# EAGLE board 1EE2CE_Senior_Design_Multicell Battery Load Analyzer (EAGLE 9.7.0)
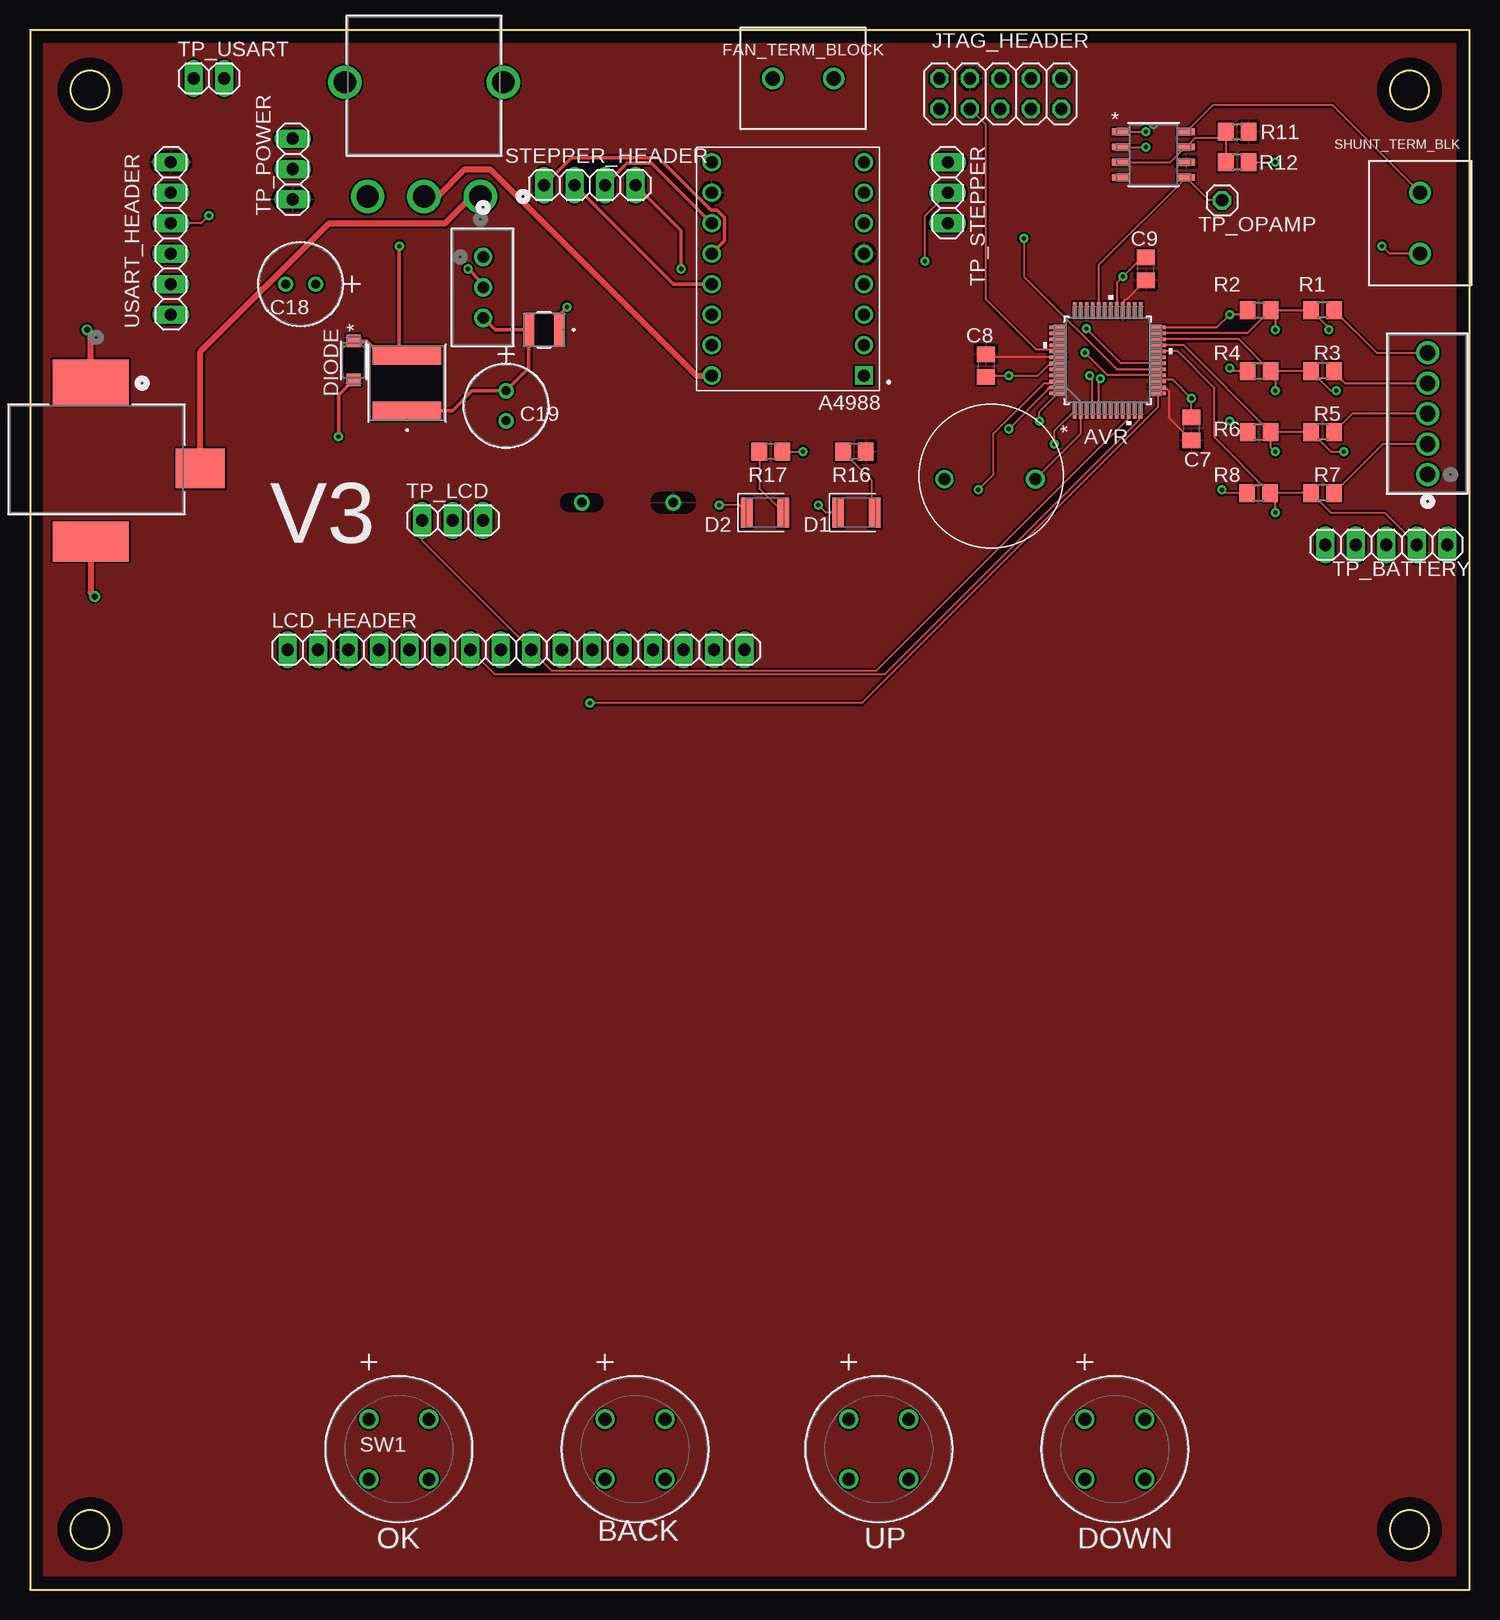
[diagram p0: board, top side]
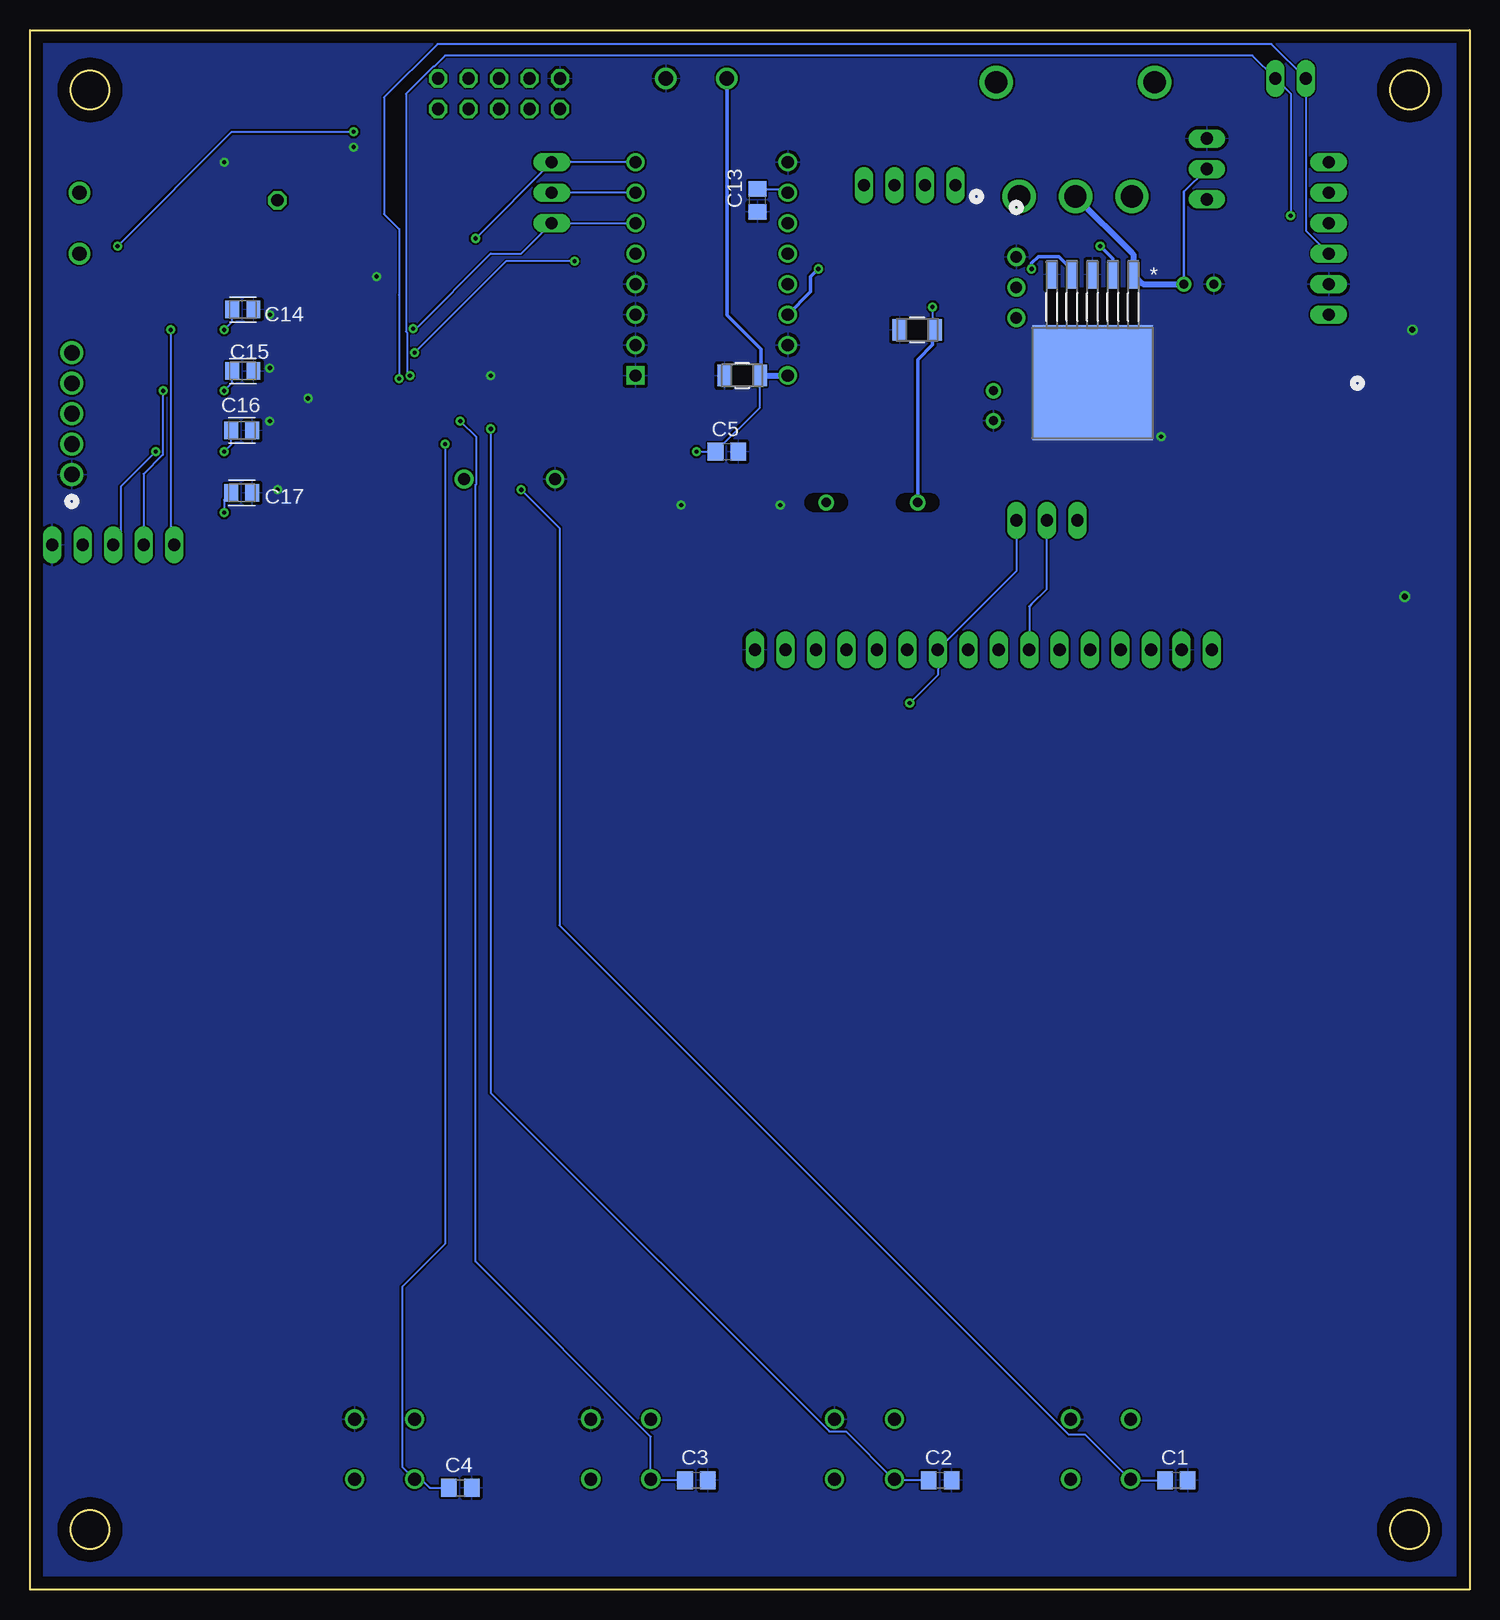
[diagram p1: board, bottom side, seen from below]

Size 120 x 130 mm. Coordinates in mm from the lower left corner, seen from the top.
Outline: 0,0 120,0 120,130 0,130 0,0
Outline: circle at 115,5 radius 1.6
Outline: circle at 115,125 radius 1.6
Outline: circle at 5,125 radius 1.6
Outline: circle at 5,5 radius 1.6
Copper layers (1*16): Top / Bottom
Stack-up Default Layer Stack: Top User Defined 0.035mm / Dielectric-1 User Defined 1.5mm / Bottom User Defined 0.035mm
Design rules: minimum copper width class=1 1mm, minimum copper width 6mil, minimum drill size 0.35mm, copper clearance wire_polygon to wire_polygon 6mil, copper clearance wire_polygon to pad_smd 6mil, copper clearance wire_polygon to via 6mil, copper clearance pad_smd to pad_smd 6mil, copper clearance pad_smd to via 6mil, copper clearance via to via 6mil, copper clearance smd to pad (same net) 6mil, copper clearance smd to via (same net) 6mil, copper clearance smd to smd (same net) 6mil, dimension clearance 40mil, via restrict clearance 0mil, restrict clearance 0mil, drill distance 6mil, keepout clearance 0mil
Net classes: 1 highest_current: width 1 mm

## Footprints (pad centres in the part's own frame; a part is rotated, then mirrored left to right if it is on the bottom)
IND_TAIYO_CBC3225_TAY = smd 0.851 x 2.692: 1 -1.276,0; 2 1.276,0
IND_TAIYO_NR6028_TAY = smd 1.6 x 5.69: 1 -2.349,0; 2 2.349,0
RES_PV36W503C01B00_BRN = drill 0.965 pad 1.524: 1 0,0; 2 2.54,0; 3 5.08,0
CAP_GRM31C_MUR = smd 1.168 x 1.803: 1 -1.473,0; 2 1.473,0
MODULE_A4988_STEPPER_MOTOR_DRIVER_CARRIER = drill 1.02 square: 1 -6.35,8.89 | drill 1.02: 2 -6.35,6.35; 3 -6.35,3.81; 4 -6.35,1.27; 5 -6.35,-1.27; 6 -6.35,-3.81; 7 -6.35,-6.35; 8 -6.35,-8.89; 9 6.35,-8.89; 10 6.35,-6.35; 11 6.35,-3.81; 12 6.35,-1.27; 13 6.35,1.27; 14 6.35,3.81; 15 6.35,6.35; 16 6.35,8.89
TQFP48_PT_MCH = smd 1.346 x 0.279: 1 -4.178,2.75; 2 -4.178,2.25; 3 -4.178,1.75; 4 -4.178,1.25; 5 -4.178,0.75; 6 -4.178,0.25; 7 -4.178,-0.25; 8 -4.178,-0.75; 9 -4.178,-1.25; 10 -4.178,-1.75; 11 -4.178,-2.25; 12 -4.178,-2.75; 25 4.178,-2.75; 26 4.178,-2.25; 27 4.178,-1.75; 28 4.178,-1.25; 29 4.178,-0.75; 30 4.178,-0.25; 31 4.178,0.25; 32 4.178,0.75; 33 4.178,1.25; 34 4.178,1.75; 35 4.178,2.25; 36 4.178,2.75 | smd 0.279 x 1.346: 13 -2.75,-4.178; 14 -2.25,-4.178; 15 -1.75,-4.178; 16 -1.25,-4.178; 17 -0.75,-4.178; 18 -0.25,-4.178; 19 0.25,-4.178; 20 0.75,-4.178; 21 1.25,-4.178; 22 1.75,-4.178; 23 2.25,-4.178; 24 2.75,-4.178; 37 2.75,4.178; 38 2.25,4.178; 39 1.75,4.178; 40 1.25,4.178; 41 0.75,4.178; 42 0.25,4.178; 43 -0.25,4.178; 44 -0.75,4.178; 45 -1.25,4.178; 46 -1.75,4.178; 47 -2.25,4.178; 48 -2.75,4.178
JACK_RASM712BKZ_SWC = smd 3.81 x 6.35: 1 -6.426,-0.483 | smd 3.302 x 4.064: 2 0.762,8.661 | smd 3.302 x 6.35: 3 6.858,-0.483
CONN5_516X256_OST = drill 1.295 pad 1.803: 1 0,0; 2 -2.54,0; 3 -5.08,0; 4 -7.62,0; 5 -10.16,0
C0805 = smd 1.3 x 1.5: 1 -0.95,0; 2 0.95,0
CAPC2012X110 = smd 1.165 x 1.465: 1 -0.875,0; 2 0.875,0
CAP_YX_6P3X11_RUB = drill 0.762 pad 1.27: 1 0,0; 2 2.5,0
LEDC3224X250N_RND-G = smd 0.962 x 2.512: A 1.525,0; C -1.525,0
LEDC3224X250N_RND-R = smd 0.962 x 2.512: A 1.525,0; C -1.525,0
SOD_34FA_ONS = smd 1.041 x 1.194: 1 -1.613,0; 2 1.613,0
TERMBLK_508-2N = drill 1.2: 1 0,0; 2 5.08,0
2X05 = drill 1.016 octagon: 1 -5.08,-1.27; 2 -5.08,1.27; 3 -2.54,-1.27; 4 -2.54,1.27; 5 0,-1.27; 6 0,1.27; 7 2.54,-1.27; 8 2.54,1.27; 9 5.08,-1.27; 10 5.08,1.27
1X16 = drill 1.016 long: 1 -19.05,0; 2 -16.51,0; 3 -13.97,0; 4 -11.43,0; 5 -8.89,0; 6 -6.35,0; 7 -3.81,0; 8 -1.27,0; 9 1.27,0; 10 3.81,0; 11 6.35,0; 12 8.89,0; 13 11.43,0; 14 13.97,0; 15 16.51,0; 16 19.05,0
D2PAK-5_ONS-L = smd 0.914 x 2.388: 1 -3.404,-9.068; 2 -1.702,-9.068; 3 0,-9.068; 4 1.702,-9.068; 5 3.404,-9.068 | smd 10.033 x 9.601: 6 0,-0.051
R-8_ADI = smd 1.46 x 0.559: 1 -2.724,1.905; 2 -2.724,0.635; 3 -2.724,-0.635; 4 -2.724,-1.905; 5 2.724,-1.905; 6 2.724,-0.635; 7 2.724,0.635; 8 2.724,1.905
R0805 = smd 1.3 x 1.5: 1 -0.95,0; 2 0.95,0
1X04 = drill 1.016 long: 1 -3.81,0; 2 -1.27,0; 3 1.27,0; 4 3.81,0
D6R90_CNK = drill 1.067 pad 1.575: 1 0,0; 2 5,0; 3 5,-5; 4 0,-5
SW3_500SSP3S1M6QEA_EWI = drill 1.854 pad 2.362: 1 0,0; 2 4.7,0; 3 9.4,0; 4 -1.904,-9.525; 5 11.304,-9.525
1X05 = drill 1.016 long: 1 -5.08,0; 2 -2.54,0; 3 0,0; 4 2.54,0; 5 5.08,0
1X03 = drill 1.016 long: 1 -2.54,0; 2 0,0; 3 2.54,0
1X01 = drill 1.016 octagon: 1 0,0
1X02 = drill 1.016 long: 1 -1.27,0; 2 1.27,0
FUSE = drill 0.8 slot 2.8: P$1 8.89,0; P$3 1.27,0
BUZZER = drill 1 pad 1.6: + 3.69,-0.24 | drill 1 pad 1.27: - -3.91,-0.24
1X06 = drill 1.016 long: 1 -6.35,0; 2 -3.81,0; 3 -1.27,0; 4 1.27,0; 5 3.81,0; 6 6.35,0

## Placement (x,y rotation side)
22UH_L  CBC3225T220KRIND_TAIYO_CBC3225_TAY  [IND_TAIYO_CBC3225_TAY]  42.86,105 180 top
33UH_L  33uH  [IND_TAIYO_NR6028_TAY]  31.43,100.56 90 top
50KPOT  PV36W503C01B00RES_PV36W503C01B00_BRN  [RES_PV36W503C01B00_BRN]  37.77,111.08 270 top
100UF_CAP1  GRM31CD80J107MEA8KCAP_GRM31C_MUR  [CAP_GRM31C_MUR]  60.63,101.19 0 bottom
100UF_CAP2  100uF  [CAP_GRM31C_MUR]  46.03,105 180 bottom
A4988  A4988_STEPPER_MOTOR_DRIVER_CARRIER  [MODULE_A4988_STEPPER_MOTOR_DRIVER_CARRIER]  63.17,110.09 180 top
AVR  AVR128DB48T-E/PTTQFP48_PT_MCH  [TQFP48_PT_MCH]  89.84,102.47 90 top
BARREL_CONNECTOR  RASM712BKZJACK_RASM712BKZ_SWC  [JACK_RASM712BKZ_SWC]  5.54,94.21 270 top
BATTERY_TERM_BLK  OSTVN05A150CONN5_516X256_OST  [CONN5_516X256_OST]  116.52,92.94 270 top
C1  1uF  [C0805]  24.44,9.12 0 bottom
C2  1uF  [C0805]  44.12,9.12 0 bottom
C3  1uF  [C0805]  64.44,9.12 0 bottom
C4  1uF  [C0805]  84.13,8.48 0 bottom
C5  10uF  [C0805]  61.91,94.84 0 bottom
C7  100nF  [C0805]  96.83,96.75 90 top
C8  100nF  [C0805]  79.69,102.02 270 top
C9  100nF  [C0805]  93.02,110.09 90 top
C13  100nF  [C0805]  59.37,115.8 90 bottom
C14  100nF  [CAPC2012X110]  102.25,106.7 0 bottom
C15  100nF  [CAPC2012X110]  102.25,101.58 0 bottom
C16  100nF  [CAPC2012X110]  102.35,96.62 0 bottom
C17  100nF  [CAPC2012X110]  102.35,91.42 0 bottom
C18  100 uF  [CAP_YX_6P3X11_RUB]  23.8,108.81 180 top
C19  220 uF  [CAP_YX_6P3X11_RUB]  39.68,99.92 270 top
D1  LED_GREEN  [LEDC3224X250N_RND-G]  68.89,89.77 0 top
D2  LED_RED  [LEDC3224X250N_RND-R]  61.27,89.77 0 top
DIODE  SS34FASOD_34FA_ONS  [SOD_34FA_ONS]  26.98,102.47 270 top
FAN_TERM_BLOCK  TERM-BLK-2P  [TERMBLK_508-2N]  66.98,125.96 180 top
JTAG_HEADER  PINHD-2X5  [2X05]  80.9,124.69 0 top
LCD_HEADER  PINHD-1X16  [1X16]  40.52,78.34 0 top
LM2596  LM2596DSADJR4GD2PAK-5_ONS-L  [D2PAK-5_ONS-L]  31.43,100.56 180 bottom
OP_AMP  AD8410AWBRZ-RLR-8_ADI  [R-8_ADI]  93.66,119.61 0 top
R1  4.3K  [R0805]  107.75,106.66 180 top
R2  1K  [R0805]  102.47,106.66 0 top
R3  4.3K  [R0805]  107.75,101.58 180 top
R4  1K  [R0805]  102.47,101.58 0 top
R5  4.3K  [R0805]  107.75,96.5 180 top
R6  1K  [R0805]  102.47,96.5 0 top
R7  4.3K  [R0805]  107.75,91.42 180 top
R8  1K  [R0805]  102.42,91.42 0 top
R11  32k  [R0805]  100.64,121.52 0 top
R12  1k  [R0805]  100.64,118.97 180 top
R16  1K  [R0805]  68.73,94.84 180 top
R17  2K  [R0805]  61.75,94.84 180 top
SHUNT_TERM_BLK  TERM-BLK-2P  [TERMBLK_508-2N]  115.88,111.35 90 top
STEPPER_HEADER  PINHD-1X04_1X04M  [1X04]  46.66,117.07 0 top
SW1  D6R90F2LFSD6R90_CNK  [D6R90_CNK]  28.25,14.2 0 top
SW2  500SSP3S1M6QEASW3_500SSP3S1M6QEA_EWI  [SW3_500SSP3S1M6QEA_EWI]  37.55,116.12 180 top
SW5  D6R90F2LFSD6R90_CNK  [D6R90_CNK]  87.94,14.2 0 top
SW6  D6R90F2LFSD6R90_CNK  [D6R90_CNK]  68.25,14.2 0 top
SW7  D6R90F2LFSD6R90_CNK  [D6R90_CNK]  47.94,14.2 0 top
TP_BATTERY  PINHD-1X5  [1X05]  113.07,87.08 0 top
TP_LCD  PINHD-1X03_1X03M  [1X03]  35.23,89.13 0 top
TP_OPAMP  PINHD-1X1  [1X01]  99.37,115.8 0 top
TP_POWER  PINHD-1X3  [1X03]  21.9,118.42 90 top
TP_STEPPER  PINHD-1X03_1X03M  [1X03]  76.51,116.44 270 top
TP_USART  PINHD-1X02_1X02M  [1X02]  14.91,125.96 0 top
U$1  FUSE_1A  [FUSE]  54.89,90.61 180 top
U$4  BUZZER_  [BUZZER]  80.13,92.81 0 top
USART_HEADER  PINHD-1X6  [1X06]  11.74,112.62 270 top

## Library data of the parts
22UH_L = 2025-04-20_23-54-14_Library; COPYRIGHT: Copyright (C) 2025 Ultra Librarian. All rights reserved.; MANUFACTURER_PART_NUMBER: CBC3225T220KR; MFR_NAME: Taiyo Yuden
33UH_L = 2025-04-20_23-55-25_Library; COPYRIGHT: Copyright (C) 2025 Ultra Librarian. All rights reserved.; MANUFACTURER_PART_NUMBER: NR6028T330M; MFR_NAME: Taiyo Yuden
50KPOT = 2025-04-20_23-31-35_Library; COPYRIGHT: Copyright (C) 2025 Ultra Librarian. All rights reserved.; MANUFACTURER_PART_NUMBER: PV36W503C01B00; MFR_NAME: Bourns Electronics
100UF_CAP1 100UF_CAP2 = 2025-04-20_23-59-12_Library; COPYRIGHT: Copyright (C) 2025 Ultra Librarian. All rights reserved.; MANUFACTURER_PART_NUMBER: GRM31CD80J107MEA8K; MFR_NAME: Murata
A4988 = A4988_STEPPER_MOTOR_DRIVER_CARRIER; AVAILABILITY: Not in stock; CHECK_PRICES: https://www.snapeda.com/parts/A4988%20STEPPER%20MOTOR%20DRIVER%20CARRIER/Pololu/view-part/?ref=eda; DESCRIPTION: Stepper Motor Driver; MF: Pololu; MP: A4988 STEPPER MOTOR DRIVER CARRIER; PACKAGE: None; PRICE: None; SNAPEDA_LINK: https://www.snapeda.com/parts/A4988%20STEPPER%20MOTOR%20DRIVER%20CARRIER/Pololu/view-part/?ref=snap
AVR = Multicell Battery Load Analyzer Components; COPYRIGHT: Copyright (C) 2024 Ultra Librarian. All rights reserved.; MANUFACTURER_PART_NUMBER: AVR128DB48T-E/PT; MFR_NAME: Microchip
BARREL_CONNECTOR = barrel; COPYRIGHT: Copyright (C) 2024 Ultra Librarian. All rights reserved.; MANUFACTURER_PART_NUMBER: RASM712BKZ; MFR_NAME: Switchcraft; TYPE: Power Connectors
BATTERY_TERM_BLK = 2025-04-23_05-03-51_Library; COPYRIGHT: Copyright (C) 2025 Ultra Librarian. All rights reserved.; MANUFACTURER_PART_NUMBER: OSTVN05A150; MFR_NAME: On Shore Technology
C1-C5 C7-C9 C13 = rcl; SPICEPREFIX: C
C14-C17 = Capacitor; CATEGORY: Capacitor
C18 = 2024-12-20_15-01-37_Library; COPYRIGHT: Copyright (C) 2024 Ultra Librarian. All rights reserved.; MANUFACTURER_PART_NUMBER: 35YXJ100M6.3X11; MFR_NAME: Rubycon
C19 = 220cap; COPYRIGHT: Copyright (C) 2024 Ultra Librarian. All rights reserved.; MANUFACTURER_PART_NUMBER: 25YXG220MEFC6.3X11; MFR_NAME: Rubycon
D1 = LED; CATEGORY: LED; COLOR: GREEN; DESCRIPTION: CHIP LED ROUND; SUB-CATEGORY: CHIP; TYPE: ROUND_TOP
D2 = LED; CATEGORY: LED; COLOR: RED; DESCRIPTION: CHIP LED ROUND; SUB-CATEGORY: CHIP; TYPE: ROUND_TOP
DIODE = new_diode; COPYRIGHT: Copyright (C) 2024 Ultra Librarian. All rights reserved.; MANUFACTURER_PART_NUMBER: SS34FA; MFR_NAME: onsemi
FAN_TERM_BLOCK SHUNT_TERM_BLK = Connector; CATEGORY: Fixed Terminal Blocks; DESCRIPTION: Fixed Terminal Blocks 5.08MM PCB MOUNT 2P; MANUFACTURER: TE Connectivity AMP Connectors; MPN: 282837-2; OPERATING_TEMPERATURE: -40°C to +105°C; PART_STATUS: ACTIVE; PITCH: 0.200" (5.08mm); ROHS_COMPLIANCE: RoHS Compliant; SERIES: Buchanan; SUBCATEGORY: Terminal Blocks; TYPE: Through Hole; Screw - Rising Cage Clamp; Side wire entry, Horizontal with Board
JTAG_HEADER = Connector; CATEGORY: Headers; DESCRIPTION: Header, Straight, 2x5 Position; MANUFACTURER: Generic; MPN: Generic; OPERATING_TEMPERATURE: Generic; PART_STATUS: Active; PITCH: 0.100" (2.54mm); ROHS_COMPLIANCE: Generic; SERIES: Generic; SUB-CATEGORY: Headers, Male Pins; TYPE: Board to Board or Cable, Unshrouded, Through Hole, Straight
LCD_HEADER = Connector; CATEGORY: Headers; DESCRIPTION: Header, Straight, 16 Position; MANUFACTURER: Generic; MPN: Generic; OPERATING_TEMPERATURE: Generic; PART_STATUS: Active; PITCH: 0.100" (2.54mm); ROHS_COMPLIANCE: Generic; SERIES: Generic; SUB-CATEGORY: Headers, Male Pins; TYPE: Board to Board or Cable, Unshrouded, Through Hole, Straight
LM2596 = 2024-12-18_22-44-57_Library; COPYRIGHT: Copyright (C) 2024 Ultra Librarian. All rights reserved.; MANUFACTURER_PART_NUMBER: LM2596DSADJR4G; MFR_NAME: onsemi
OP_AMP = 2025-04-21_02-25-22_Library; COPYRIGHT: Copyright (C) 2025 Ultra Librarian. All rights reserved.; MANUFACTURER_PART_NUMBER: AD8410AWBRZ-RL; MFR_NAME: Analog Devices Inc; TYPE: Linear
R1-R8 R11 R12 R16 R17 = rcl; SPICEPREFIX: R
STEPPER_HEADER TP_LCD TP_STEPPER TP_USART = Tinkercad
SW1 SW5-SW7 = pushbutton; COPYRIGHT: Copyright (C) 2025 Ultra Librarian. All rights reserved.; MANUFACTURER_PART_NUMBER: D6R90F2LFS; MFR_NAME: C&K Components; TYPE: Pushbutton Switches
SW2 = 2025-04-21_00-24-51_Library; COPYRIGHT: Copyright (C) 2025 Ultra Librarian. All rights reserved.; MANUFACTURER_PART_NUMBER: 500SSP3S1M6QEA; MFR_NAME: E-Switch
TP_BATTERY = Connector; CATEGORY: Headers; DESCRIPTION: Header, Straight, 5 Position; MANUFACTURER: Generic; MPN: Generic; OPERATING_TEMPERATURE: Generic; PART_STATUS: Active; PITCH: 0.100" (2.54mm); ROHS_COMPLIANCE: Generic; SERIES: Generic; SUB-CATEGORY: Headers, Male Pins; TYPE: Board to Board or Cable, Unshrouded, Through Hole, Straight
TP_OPAMP = Connector; CATEGORY: Headers; DESCRIPTION: Header, Straight, 1 Position; MANUFACTURER: Generic; MPN: Generic; OPERATING_TEMPERATURE: Generic; PART_STATUS: Active; PITCH: 0.100" (2.54mm); ROHS_COMPLIANCE: Generic; SERIES: Generic; SUB-CATEGORY: Headers, Male Pins; TYPE: Board to Board or Cable, Unshrouded, Through Hole, Straight
TP_POWER = Connector; CATEGORY: Headers; DESCRIPTION: Header, Straight, 3 Position; MANUFACTURER: Generic; MPN: Generic; OPERATING_TEMPERATURE: Generic; PART_STATUS: Active; PITCH: 0.100" (2.54mm); ROHS_COMPLIANCE: Generic; SERIES: Generic; SUB-CATEGORY: Headers, Male Pins; TYPE: Board to Board or Cable, Unshrouded, Through Hole, Straight
U$1 = Fuse_1A
U$4 = buzzer
USART_HEADER = Connector; CATEGORY: Headers; DESCRIPTION: Header, Straight, 6 Position; MANUFACTURER: Generic; MPN: Generic; OPERATING_TEMPERATURE: Generic; PART_STATUS: Active; PITCH: 0.100" (2.54mm); ROHS_COMPLIANCE: Generic; SERIES: Generic; SUB-CATEGORY: Headers, Male Pins; TYPE: Board to Board or Cable, Unshrouded, Through Hole, Straight

## Nets
+3.3V: A4988.5 A4988.10 AVR.14 AVR.28 AVR.42 C7.1 C8.1 C9.1 C13.2 JTAG_HEADER.4 LCD_HEADER.3 OP_AMP.6 R11.2 R16.1 TP_POWER.1 U$1.P$3 USART_HEADER.1
+12V: 100UF_CAP1.2 A4988.16 C5.1 C18.1 FAN_TERM_BLOCK.2 LM2596.1 R17.1 SW2.2 TP_POWER.2
A4988_DIR: A4988.8 AVR.17 TP_STEPPER.1
A4988_SLEEP: A4988.6 AVR.18 TP_STEPPER.3
A4988_STEP: A4988.7 AVR.16 TP_STEPPER.2
ADC0_AIN0: AVR.20 C17.1 R7.2 R8.2 TP_BATTERY.4
ADC0_AIN1: AVR.21 C16.1 R5.2 R6.2 TP_BATTERY.3
ADC0_AIN2: AVR.22 C15.1 R3.2 R4.2 TP_BATTERY.2
ADC0_AIN3: AVR.23 C14.1 R1.2 R2.2 TP_BATTERY.1
ADC0_AIN10_OPAMP: AVR.32 OP_AMP.5 TP_OPAMP.1
B1+: BATTERY_TERM_BLK.2 R7.1
B2+: BATTERY_TERM_BLK.3 R5.1
B3+: BATTERY_TERM_BLK.4 R3.1
B4+: BATTERY_TERM_BLK.5 R1.1
BACK_PB_IN: AVR.47 C2.1 SW7.4
BUZZER: AVR.2 U$4.+
DOWN_PB_IN: AVR.1 C4.1 SW5.4
FEEDBACK: 50KPOT.2 LM2596.4
GND: 50KPOT.1 100UF_CAP1.1 100UF_CAP2.2 A4988.1 A4988.2 A4988.3 A4988.4 A4988.9 A4988.15 AVR.15 AVR.24 AVR.29 AVR.43 BARREL_CONNECTOR.1 BARREL_CONNECTOR.3 BATTERY_TERM_BLK.1 C1.2 C2.2 C3.2 C4.2 C5.2 C7.2 C8.2 C9.2 C13.1 C14.2 C15.2 C16.2 C17.2 C18.2 C19.2 D1.C D2.C DIODE.2 FAN_TERM_BLOCK.1 JTAG_HEADER.2 LCD_HEADER.2 LCD_HEADER.16 LM2596.3 LM2596.5 LM2596.6 OP_AMP.2 R2.1 R4.1 R6.1 R8.1 R12.1 SW1.2 SW5.2 SW6.2 SW7.2 TP_BATTERY.5 TP_POWER.3 U$4.- USART_HEADER.5
N$2: A4988.13 STEPPER_HEADER.2
N$3: A4988.14 STEPPER_HEADER.4
N$4: A4988.11 STEPPER_HEADER.3
N$5: A4988.12 STEPPER_HEADER.1
N$6: D1.A R16.2
N$7: D2.A R17.2
N$8: OP_AMP.1 SHUNT_TERM_BLK.1
N$9: BARREL_CONNECTOR.2 SW2.1
N$10: 22UH_L.1 100UF_CAP2.1 U$1.P$1
N$11: OP_AMP.8 SHUNT_TERM_BLK.2
OK_PB_IN: AVR.46 C1.1 SW1.4
OPAMP_OFFSET: OP_AMP.3 OP_AMP.7 R11.1 R12.2
OUTPUT_POT: 22UH_L.2 33UH_L.1 50KPOT.3 C19.1
OUTPUT_TO_INDUCTOR: 33UH_L.2 DIODE.1 LM2596.2
SPI1_MOSI: AVR.10 LCD_HEADER.9 TP_LCD.1
SPI1_SCK: AVR.12 LCD_HEADER.7 TP_LCD.2
SPI1_SS: AVR.13 LCD_HEADER.10 TP_LCD.3
UP_PB_IN: AVR.48 C3.1 SW6.4
UPDI_DATA: AVR.41 JTAG_HEADER.3
USART3_RXD: AVR.4 TP_USART.2 USART_HEADER.3
USART3_TXD: AVR.5 TP_USART.1 USART_HEADER.4

## Tracks (layer width: path | path; a pad name or v marks a point on that pad's centre or on a via)
+3.3V
  Top 0.152: AVR.14 94.16,100.08 94.79,100.08 94.92,99.95 94.92,97.7 C7.1 | AVR.42 79.94,102.72 C8.1 | C9.1 91.43,107.55 91.36,107.55 91.09,107.28 AVR.28
  Bottom 0.152: C13.2 57.14,116.75 A4988.10
  pour Top: 120,0 0,0 0,130 120,130
+12V  (via drill 0.35)
  Top 0.152: R17.1 v64.44,94.84
  Top 0.5: SW2.2 33.99,116.12 36.24,118.38 38.37,118.38 55.55,101.19 A4988.16
  Bottom 0.152: v64.44,94.84 C5.1 59.16,98.54 100UF_CAP1.2 59.07,101.28 | 28.16,111.44 28.02,111.3
  Bottom 0.2: TP_POWER.2 23.8,116.51 23.83,116.49 23.83,115.39 23.8,115.37 C18.1
  Bottom 0.3: 59.07,101.28 59.07,103.41 61.91,106.24 FAN_TERM_BLOCK.2
  Bottom 0.5: 100UF_CAP1.2 A4988.16 | SW2.2 28.16,111.44 | 28.02,111.3 LM2596.1 27.21,108.81 C18.1
A4988_DIR  (via drill 0.35)
  Top 0.152: AVR.17 90.59,101.72 83.5,108.81 82.86,109.45 v82.86,112.62
  Bottom 0.152: A4988.8 TP_STEPPER.1 v82.86,112.62
A4988_SLEEP  (via drill 0.35)
  Top 0.152: v88.05,105.12 90.95,102.22 AVR.18
  Bottom 0.152: A4988.6 TP_STEPPER.3 79.05,111.35 81.59,111.35 87.83,105.12 v88.05,105.12
A4988_STEP  (via drill 0.35)
  Top 0.152: AVR.16 89.83,101.22 v87.94,103.1 | v74.61,110.72 74.61,114.53 TP_STEPPER.2
  Bottom 0.152: A4988.7 TP_STEPPER.2 | v87.94,103.1 80.32,110.72 v74.61,110.72
ADC0_AIN0  (via drill 0.35)
  Top 0.152: 103.81,91.42 R7.2 108.45,89.77 112.92,89.77 TP_BATTERY.4 | 103.81,91.42 R8.2 98.73,96.05 98.73,100.15 95.67,103.22 AVR.20 | v103.81,89.77 103.81,91.42
  Bottom 0.152: C17.1 103.81,90.82 v103.81,89.77
ADC0_AIN1  (via drill 0.35)
  Top 0.152: v109.53,94.84 108.45,94.84 R5.2 R6.2 | AVR.21 96.2,103.72 R6.2 | R6.2 103.41,95.25 v103.81,94.84
  Bottom 0.152: v109.53,94.84 112.43,91.94 112.43,87.72 TP_BATTERY.3 | v103.81,94.84 103.22,95.44 C16.1
ADC0_AIN2  (via drill 0.35)
  Top 0.152: v108.9,99.92 108.45,99.92 R3.2 R4.2 | R4.2 100.78,104.22 AVR.22 | R4.2 103.81,101.18 v103.81,99.92
  Bottom 0.152: TP_BATTERY.2 110.53,92.99 108.92,94.59 108.92,99.9 v108.9,99.92 | v103.81,99.92 103.13,100.61 C15.1
ADC0_AIN3  (via drill 0.35)
  Top 0.152: v108.26,105 108.26,105.2 R1.2 R2.2 | R2.2 101.47,104.72 AVR.23 | R2.2 103.81,106.26 v103.81,105
  Bottom 0.152: v108.26,105 108.26,87.36 TP_BATTERY.1 | v103.81,105 103.13,105.69 C14.1
ADC0_AIN10_OPAMP
  Top 0.152: TP_OPAMP.1 98.28,115.8 OP_AMP.5 89.09,110.42 AVR.32
B1+
  Top 0.152: BATTERY_TERM_BLK.2 112.77,95.48 R7.1
B2+
  Top 0.152: BATTERY_TERM_BLK.3 110.23,98.02 R5.1
B3+
  Top 0.152: R3.1 108.7,101.48 109.62,100.56 BATTERY_TERM_BLK.4
B4+
  Top 0.152: BATTERY_TERM_BLK.5 112.26,103.1 R1.1
BACK_PB_IN  (via drill 0.35)
  Top 0.152: v81.59,96.75 84.77,99.92 84.77,99.95 85.03,100.22 AVR.47
  Bottom 0.152: C2.1 47.94,9.12 | 47.94,9.12 SW7.4 | 47.94,9.12 51.99,13.17 53.36,13.17 81.59,41.4 v81.59,96.75
BUZZER
  Top 0.152: U$4.+ 87.59,96.35 AVR.2
DOWN_PB_IN  (via drill 0.35)
  Top 0.152: v85.4,95.48 85.4,96.59 AVR.1
  Bottom 0.152: C4.1 86.67,8.48 87.39,9.2 SW5.4 88.97,10.23 88.97,25.24 85.4,28.8 v85.4,95.48
FEEDBACK  (via drill 0.35)
  Top 0.152: 50KPOT.2 37.77,108.81
  Top 0.3: 37.77,108.81 v36.5,110.09
  Bottom 0.3: v36.5,110.09 36.5,110.56 35.94,111.12 34.25,111.12 33.13,110 LM2596.4
GND  (via drill 0.35, 0.5)
  Top 0.152: D1.C 66.35,89.77 v65.72,90.4 | D2.C 59.11,90.4 v57.46,90.4 | OP_AMP.2 v93.02,120.25 | AVR.15 94.16,100.85 95.27,100.85 v96.83,99.29 C7.2 | C8.2 79.81,101.19 v81.59,101.19 84.01,101.19 84.9,102.08 85.53,102.08 AVR.43 | R2.1 101.13,106.28 v100,106.28 98.94,105.22 AVR.24 | R4.1 100.26,101.58 v100,101.83 | R6.1 100.89,96.5 v100,97.38 | C17.2 99.62,91.42 v99.37,91.67 | AVR.29 90.59,108.94 v91.1,109.45 92.69,111.03 C9.2 | R12.1 v103.81,118.97
  Top 0.3: DIODE.2 25.71,99.58 v25.71,96.11
  Top 0.5: BARREL_CONNECTOR.3 5.05,83.11 v5.39,82.78 | BARREL_CONNECTOR.1 5.05,103.1 5.05,104.7 v4.76,105
  pour Bottom: 120,0 0,0 0,130 120,130
N$2
  Top 0.3: STEPPER_HEADER.2 53.65,108.81 A4988.13
N$3  (via drill 0.35)
  Top 0.3: STEPPER_HEADER.4 54.28,113.26 v54.28,110.09
  Bottom 0.3: v54.28,110.09 54.92,109.45 54.92,108.18 A4988.14
N$4
  Top 0.3: STEPPER_HEADER.3 49.76,118.9 51.82,118.9 A4988.11
N$5
  Top 0.3: STEPPER_HEADER.1 45.13,119.35 52.4,119.35 56.79,114.96 57.27,114.96 57.89,114.34 57.89,112.42 A4988.12
N$6
  Top 0.152: R16.2 70.16,92.47 70.16,90.02 D1.A
N$7
  Top 0.152: R17.2 60.8,91.76 D2.A
N$8  (via drill 0.35)
  Top 0.152: SHUNT_TERM_BLK.1 113.34,111.35 v112.7,111.99 | OP_AMP.1 91.75,121.52 v93.02,121.52
  Bottom 0.152: v93.02,121.52 103.18,121.52 v112.7,111.99
N$9
  Top 0.5: SW2.1 36.83,116.12 34.6,113.9 25.16,113.9 24.92,113.9 14.2,103.18 BARREL_CONNECTOR.2
N$10  (via drill 0.35)
  Top 0.152: 22UH_L.1 44.13,106.28
  Top 0.3: 44.13,106.28 v44.76,106.91
  Bottom 0.152: 44.76,104.8 100UF_CAP2.1 44.76,105.21 v44.76,106.91
  Bottom 0.3: U$1.P$1 46,102.53 44.76,103.77 44.76,104.8
N$11
  Top 0.152: OP_AMP.8 98.59,123.72 108.59,123.72 SHUNT_TERM_BLK.2
OK_PB_IN  (via drill 0.35)
  Top 0.152: v79.05,91.67 80.32,92.94 80.32,96.34 84.56,100.58 85.53,100.58 AVR.46
  Bottom 0.152: 28.25,9.12 C1.1 | SW1.4 28.25,9.12 | v79.05,91.67 75.88,88.5 75.88,55.37 33.44,12.93 32.06,12.93 28.25,9.12
OPAMP_OFFSET
  Top 0.152: OP_AMP.3 95.05,118.97 96.32,120.25 OP_AMP.7 97.14,121.01 99.11,121.01 99.62,121.52 R11.1 R12.2
OUTPUT_POT
  Top 0.152: 33UH_L.1 31.49,98.27
  Top 0.3: 50KPOT.3 38.77,105 22UH_L.2 41.58,101.82 C19.1 36.87,99.92 35.22,98.27 31.49,98.27
OUTPUT_TO_INDUCTOR  (via drill 0.35)
  Top 0.152: 31.65,102.69 33UH_L.2 29.25,102.91 29.2,102.96 | 30.79,103.54 30.79,103.59
  Top 0.3: 31.65,102.69 30.79,103.54 | 30.79,103.59 v30.79,111.99 | DIODE.1 28.08,104.08 28.34,103.82 29.2,102.96
  Bottom 0.3: v30.79,111.99 29.72,110.92 LM2596.2
SPI1_MOSI
  Top 0.152: TP_LCD.1 32.7,87.43 LCD_HEADER.9 43.54,76.58 70.53,76.58 91.59,97.65 AVR.10
SPI1_SCK
  Top 0.152: AVR.12 92.46,98.16 92.46,97.52 71.22,76.28 38.77,76.28 LCD_HEADER.7
  Bottom 0.152: TP_LCD.2 35.23,83.41 36.5,82.14 36.71,81.94 LCD_HEADER.7
SPI1_SS  (via drill 0.35)
  Top 0.152: AVR.13 94.02,98.58 69.33,73.89 v46.66,73.89
  Bottom 0.152: v46.66,73.89 44.33,76.23 LCD_HEADER.10 37.77,84.89 TP_LCD.3
UP_PB_IN  (via drill 0.35)
  Top 0.152: v84.13,97.38 84.13,98.18 AVR.48
  Bottom 0.152: C3.1 68.25,9.12 SW6.4 68.25,12.74 82.86,27.35 82.86,75.8 82.86,92.08 82.79,92.15 82.79,96.04 v84.13,97.38
UPDI_DATA
  Top 0.152: JTAG_HEADER.3 79.69,122.09 79.69,120.88 79.69,107.55 83.88,103.35 85.53,103.35 AVR.41
USART3_RXD  (via drill 0.35)
  Top 0.152: AVR.4 88.58,98.31 88.58,100.95 v88.33,101.19 | v14.91,114.53 14.28,113.9 USART_HEADER.3
  Bottom 0.152: v14.91,114.53 14.91,124.69 TP_USART.2 18.09,127.87 85.4,127.87 86.31,126.95 86.39,126.95 88.66,124.68 88.66,104.87 88.55,104.75 88.55,101.41 v88.33,101.19
USART3_TXD  (via drill 0.35)
  Top 0.152: AVR.5 89.09,100.81 v89.23,100.95
  Bottom 0.152: USART_HEADER.4 13.65,113.26 TP_USART.1 16.52,128.83 86.03,128.83 90.48,124.39 90.48,114.66 89.23,113.41 89.23,107.93 89.23,107.92 v89.23,100.95

## Text on the board
SilkscreenTop: V3
NamesTop: BACK | OK | UP | DOWN